# Altium PCB TTAmp_3T0K.PcbDoc
Units mm, origin at the board's own origin, x right, y up, seen from the top; angles counter-clockwise.
Board outline 122 x 59.94 mm, 2 copper layers (Top Layer, Bottom Layer); 145 components, 63 nets, 327 pads, 79 vias.
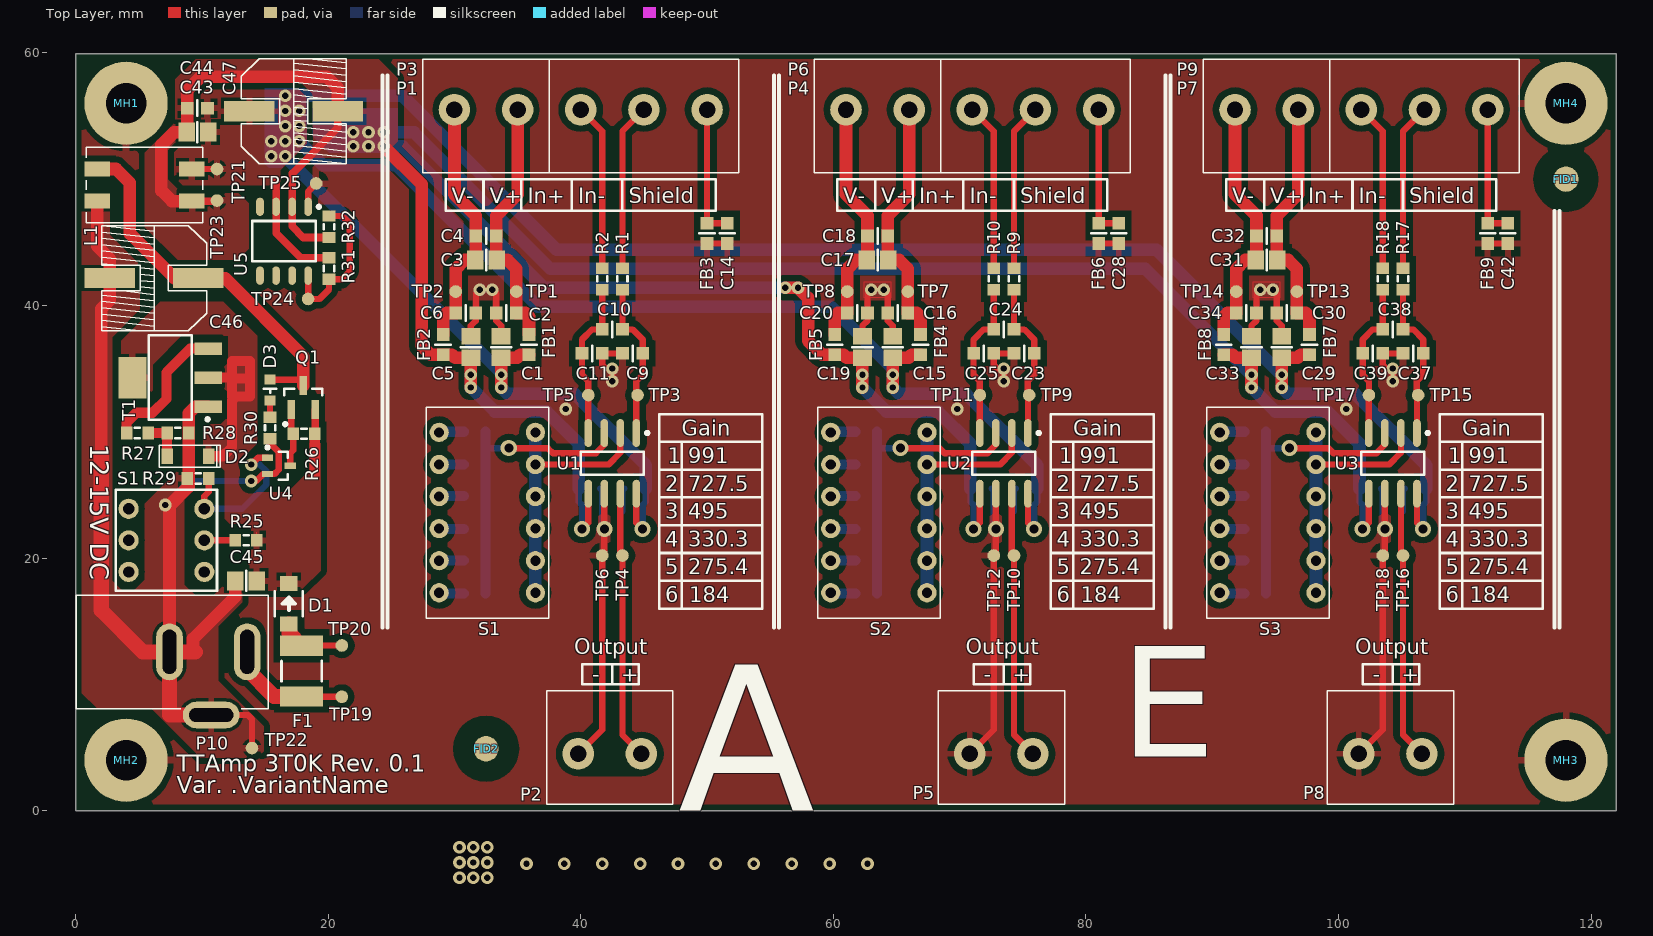
[diagram p0: Top Layer view]
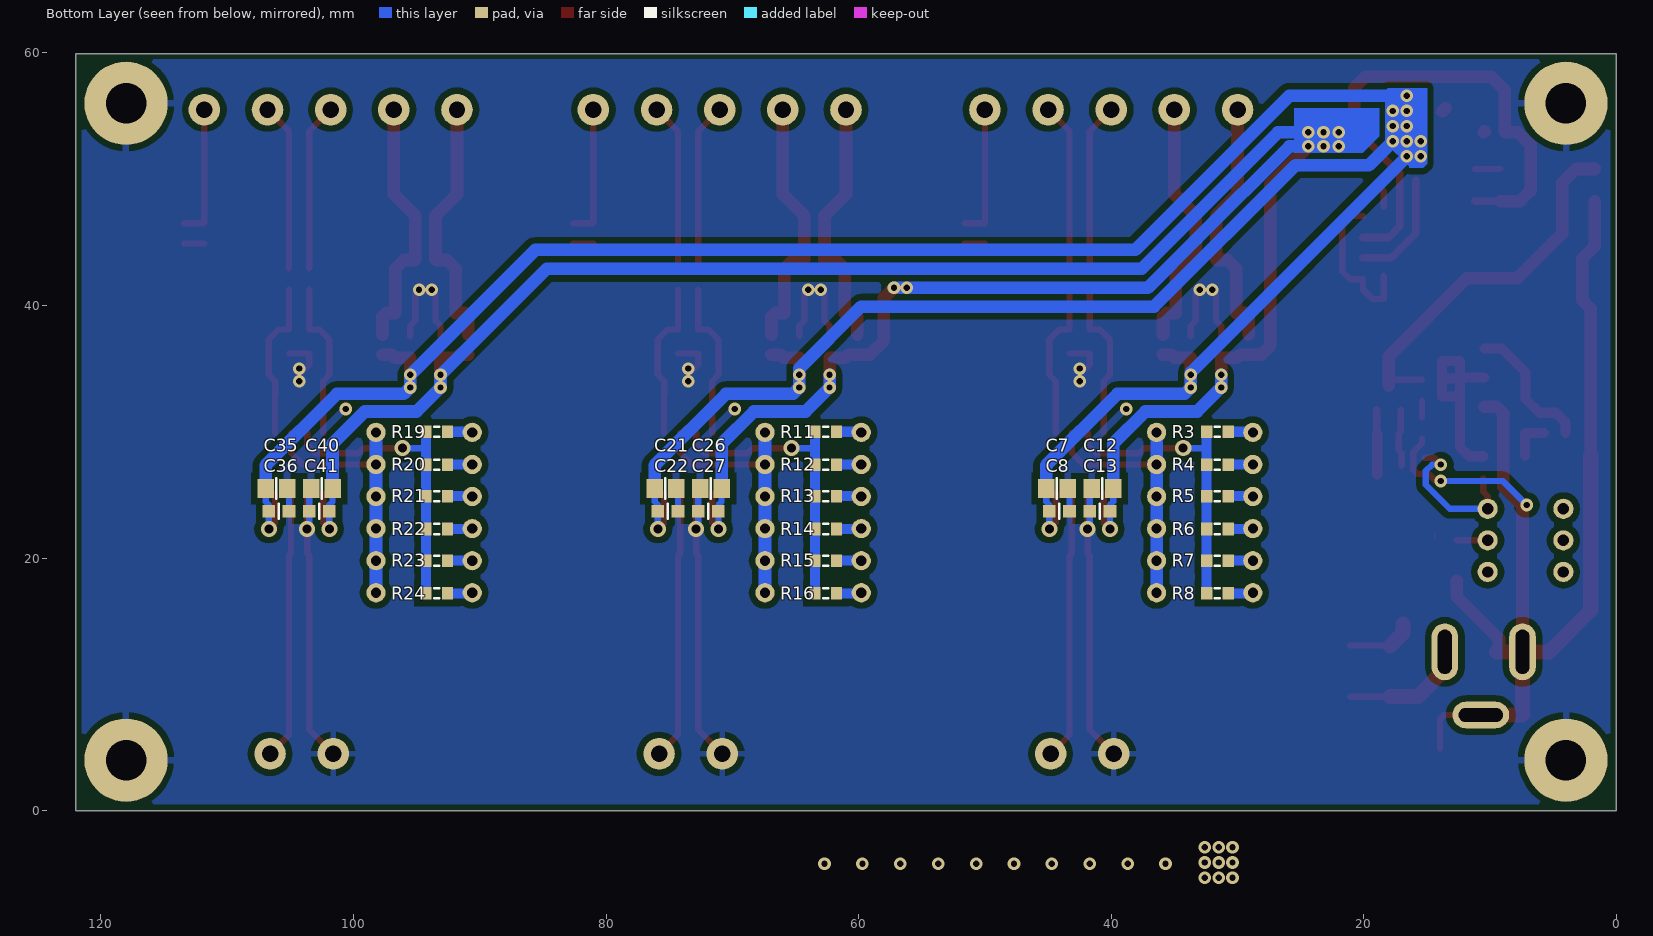
[diagram p1: Bottom Layer view, seen from below]
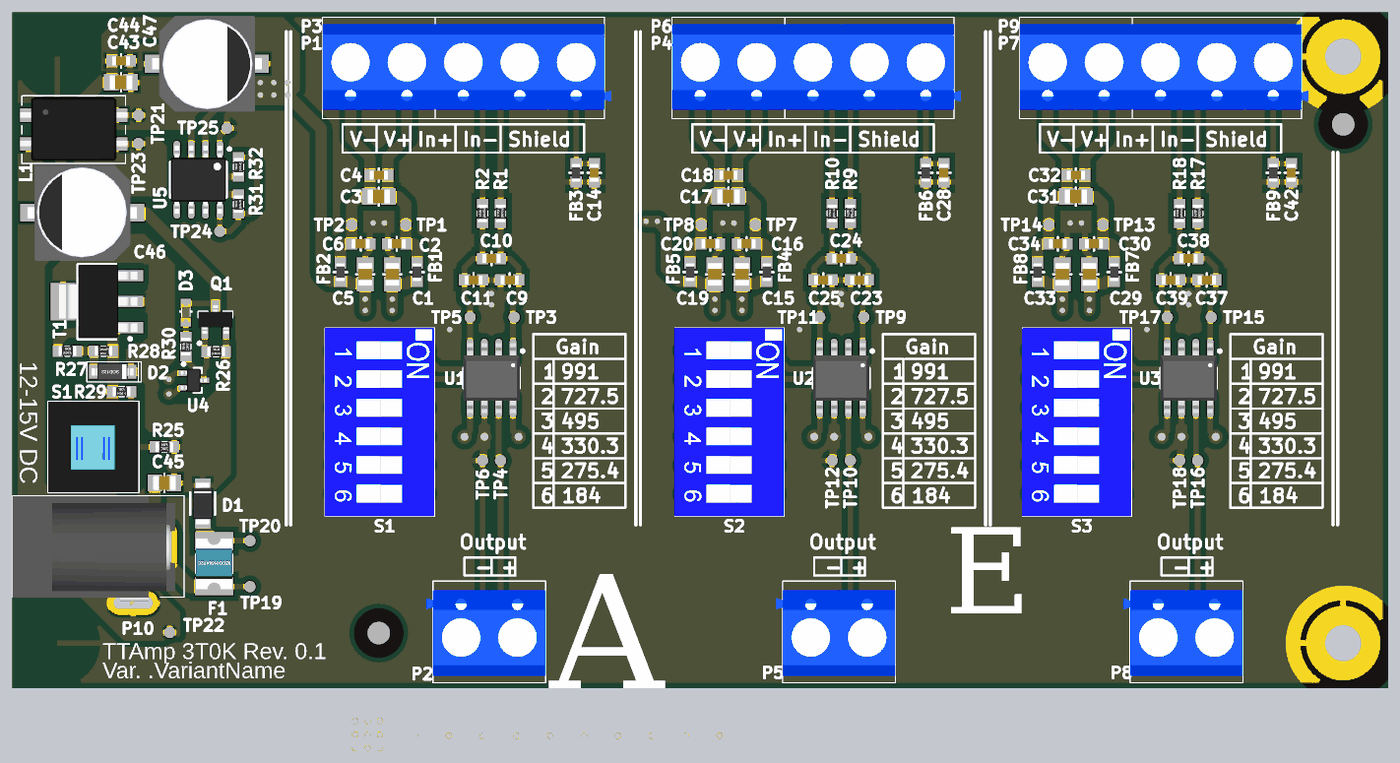
[diagram p2: 3D render of the assembled board from above, using the file's embedded part models]
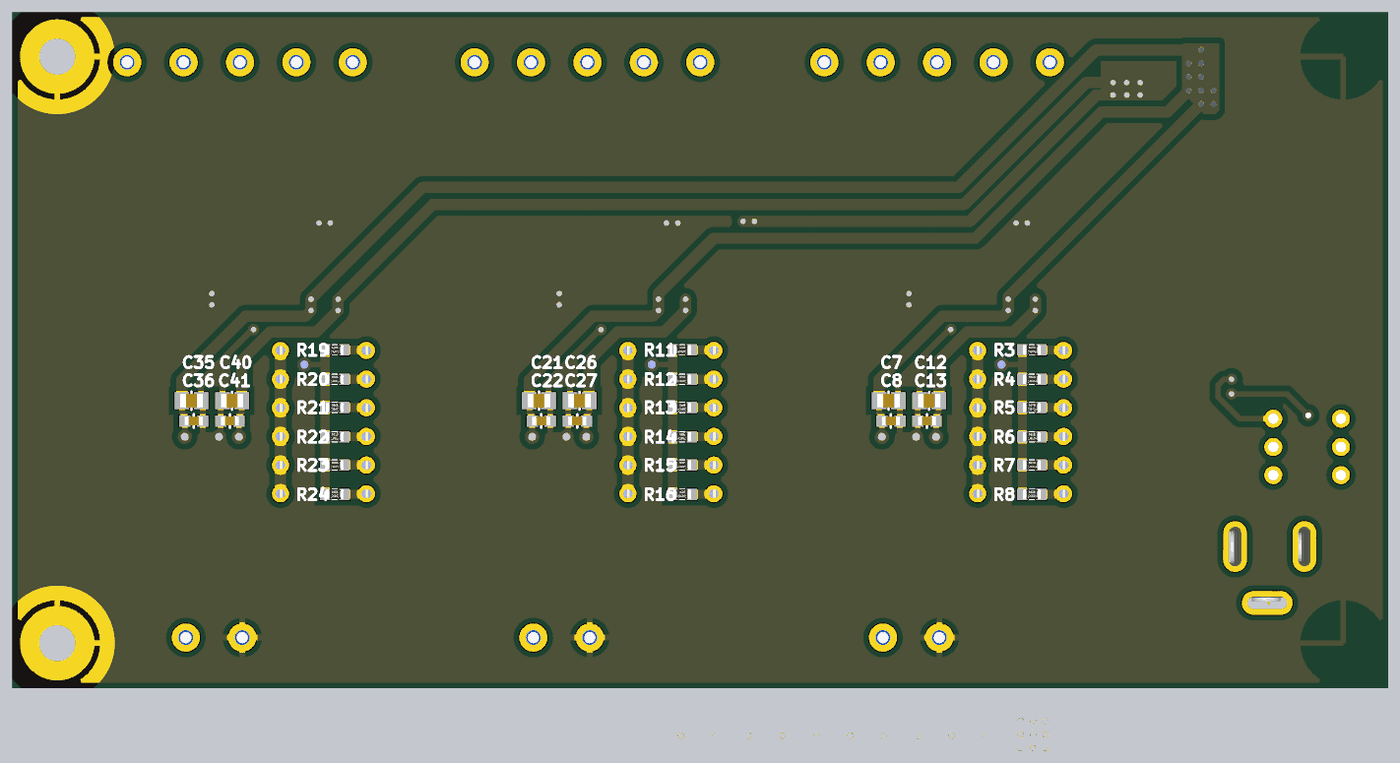
[diagram p3: 3D render of the assembled board from below, using the file's embedded part models]

## Layer stack, top to bottom
Top Solder: solder mask 0.0102, Solder Resist, Dk 3.5
Top Layer: signal copper 0.0356
Dielectric 1: dielectric 0.32, FR-4, Dk 4.8
Bottom Layer: signal copper 0.0356
Bottom Solder: solder mask 0.0102, Solder Resist, Dk 3.5

## Board outline
0,0 122,0 122,59.944 0,59.944

## Design rules (kind name [scope] priority, off if disabled: settings)
Clearance Clearance_1 [InNamedPolygon('GND_L01_P076') vs InComponent('FID*')] p1: gap=1.6 ignorepadtopadclearanceinfootprint=FALSE
Clearance [All] p2: gap=0.2 ignorepadtopadclearanceinfootprint=FALSE except(0.5: Arc-Poly Track-Poly SMDPad-Poly THPad-Poly Via-Poly Fill-Poly Poly-Poly Poly-Region Poly-Hole)
ComponentClearance ScrewTerminals [InComponent('P*')] p2: gap=0 collisioncheckmode=3 verticalgap=2540 showdistances=FALSE
PlaneClearance [All] p1: clearance=0.5
PlaneConnect [All] p1: planeconnectstyle=Relief reliefexpansion=0.5 reliefentries=4 reliefconductorwidth=0.4 reliefairgap=0.4
PolygonConnect PowerPolygon [All vs IsPolygon and ( InNet('Vs+') or InNet('Vs-') or InNet('NetC45_1') or InNet('NetC45_2') or InNet('VT1+') or InNet('VT1-') or InNet('VT2+') or InNet('VT2-') or InNet('VT3+') or InNet('VT3-') )] p1: thpad.connectstyle=Relief thpad.reliefconductorwidth=0.5 thpad.reliefentries=4 thpad.polygonreliefangle="90 Angle" thpad.airgapwidth=0.254 smdpad.connectstyle=Relief smdpad.reliefconductorwidth=0.5 smdpad.reliefentries=4 smdpad.polygonreliefangle="90 Angle" smdpad.airgapwidth=0.254 via.connectstyle=Direct via.reliefconductorwidth=0.254 via.reliefentries=4 via.polygonreliefangle="90 Angle" via.airgapwidth=0.254
PolygonConnect GNDPolygon [All vs IsPolygon and ( InNet('GND') )] p2: thpad.connectstyle=Relief thpad.reliefconductorwidth=0.5 thpad.reliefentries=4 thpad.polygonreliefangle="90 Angle" thpad.airgapwidth=0.5 smdpad.connectstyle=Relief smdpad.reliefconductorwidth=0.5 smdpad.reliefentries=4 smdpad.polygonreliefangle="90 Angle" smdpad.airgapwidth=0.5 via.connectstyle=Direct via.reliefconductorwidth=0.254 via.reliefentries=4 via.polygonreliefangle="90 Angle" via.airgapwidth=0.254
PolygonConnect [All] p3: thpad.connectstyle=Relief thpad.reliefconductorwidth=0.254 thpad.reliefentries=4 thpad.polygonreliefangle="90 Angle" thpad.airgapwidth=0.254 smdpad.connectstyle=Relief smdpad.reliefconductorwidth=0.254 smdpad.reliefentries=4 smdpad.polygonreliefangle="90 Angle" smdpad.airgapwidth=0.254 via.connectstyle=Direct via.reliefconductorwidth=0.254 via.reliefentries=4 via.polygonreliefangle="90 Angle" via.airgapwidth=0.254
RoutingVias [All] p1: holewidth=0.5 width=1 viastyle="Through Hole" minholewidth=0.2 minwidth=0.5 maxholewidth=1 maxwidth=2
SilkToSilkClearance [All] p1: silktosilkclearance=0.2
SolderMaskExpansion [All] p1: expansion=0.102
Width [All] p1: maxlimit=5 minlimit=0.2 preferedwidth=0.5
27 further rules are at their usual default settings.

## Classes and differential pairs
component class TTAmp_3T0K_power: C43 C44 C45 C46 C47 D1 D2 D3 F1 L1 P10 Q1 R25 R26 R27 R28 R29 R30 R31 R32 S1 T1 TP19 TP20 TP21 TP22 TP23 TP24 TP25 U4 U5
component class TTAmp_3T0K_Mechanical: FID1 FID2 MH1 MH2 MH3 MH4 SCR1 SCR2 SCR3 SCR4 SPCR1 SPCR2 SPCR3 SPCR4
component class TTAmp_3T0K_amp_tensometer_3: C29 C30 C31 C32 C33 C34 C35 C36 C37 C38 C39 C40 C41 C42 FB7 FB8 FB9 P7 P8 P9 R17 R18 R19 R20 R21 R22 R23 R24 S3 TP13 TP14 TP15 TP16 TP17 TP18 U3
component class TTAmp_3T0K_amp_tensometer_2: C15 C16 C17 C18 C19 C20 C21 C22 C23 C24 C25 C26 C27 C28 FB4 FB5 FB6 P4 P5 P6 R9 R10 R11 R12 R13 R14 R15 R16 S2 TP7 TP8 TP9 TP10 TP11 TP12 U2
component class TTAmp_3T0K_amp_tensometer_1: C1 C2 C3 C4 C5 C6 C7 C8 C9 C10 C11 C12 C13 C14 FB1 FB2 FB3 P1 P2 P3 R1 R2 R3 R4 R5 R6 R7 R8 S1 TP1 TP2 TP3 TP4 TP5 TP6 U1

## Components (designator, comment, footprint, x,y, rotation, side; value= is the part's Value field where it differs from the comment)
C1 "Capacitor" CAPC2012N 33.7,36.7 r270 top value=10u
C2 "Capacitor" CAPC1608N 34.1,39.4 r0 top value=100n
C3 "Capacitor" CAPC2012N 32.5,43.6 r0 top value=10u
C4 "Capacitor" CAPC1608N 32.5,45.5 r0 top value=100n
C5 "Capacitor" CAPC2012N 31.3,36.7 r90 top value=10u
C6 "Capacitor" CAPC1608N 30.9,39.4 r0 top value=100n
C7 "Capacitor" CAPC2012N 44.3,25.5 r0 bottom value=10u
C8 "Capacitor" CAPC1608N 44.1,23.7 r0 bottom value=100n
C9 "Capacitor" CAPC1608N 44.1,36.2 r180 top value=1n
C10 "Capacitor" CAPC1608N 42.5,38.1 r0 top value=10n
C11 "Capacitor" CAPC1608N 40.9,36.2 r180 top value=1n
C12 "Capacitor" CAPC2012N 40.7,25.5 r0 bottom value=10u
C13 "Capacitor" CAPC1608N 40.9,23.7 r0 bottom value=100n
C14 "Capacitor" CAPC1608N 51.6,45.7 r90 top value=100n
C15 "Capacitor" CAPC2012N 64.7,36.7 r270 top value=10u
C16 "Capacitor" CAPC1608N 65.1,39.4 r0 top value=100n
C17 "Capacitor" CAPC2012N 63.5,43.6 r0 top value=10u
C18 "Capacitor" CAPC1608N 63.5,45.5 r0 top value=100n
C19 "Capacitor" CAPC2012N 62.3,36.7 r90 top value=10u
C20 "Capacitor" CAPC1608N 61.9,39.4 r0 top value=100n
C21 "Capacitor" CAPC2012N 75.3,25.5 r0 bottom value=10u
C22 "Capacitor" CAPC1608N 75.1,23.7 r0 bottom value=100n
C23 "Capacitor" CAPC1608N 75.1,36.2 r180 top value=1n
C24 "Capacitor" CAPC1608N 73.5,38.1 r0 top value=10n
C25 "Capacitor" CAPC1608N 71.9,36.2 r180 top value=1n
C26 "Capacitor" CAPC2012N 71.7,25.5 r0 bottom value=10u
C27 "Capacitor" CAPC1608N 71.9,23.7 r0 bottom value=100n
C28 "Capacitor" CAPC1608N 82.6,45.7 r90 top value=100n
C29 "Capacitor" CAPC2012N 95.5,36.7 r270 top value=10u
C30 "Capacitor" CAPC1608N 95.9,39.4 r0 top value=100n
C31 "Capacitor" CAPC2012N 94.3,43.6 r0 top value=10u
C32 "Capacitor" CAPC1608N 94.3,45.5 r0 top value=100n
C33 "Capacitor" CAPC2012N 93.1,36.7 r90 top value=10u
C34 "Capacitor" CAPC1608N 92.7,39.4 r0 top value=100n
C35 "Capacitor" CAPC2012N 106.1,25.5 r0 bottom value=10u
C36 "Capacitor" CAPC1608N 105.9,23.7 r0 bottom value=100n
C37 "Capacitor" CAPC1608N 105.9,36.2 r180 top value=1n
C38 "Capacitor" CAPC1608N 104.3,38.1 r0 top value=10n
C39 "Capacitor" CAPC1608N 102.7,36.2 r180 top value=1n
C40 "Capacitor" CAPC2012N 102.5,25.5 r0 bottom value=10u
C41 "Capacitor" CAPC1608N 102.7,23.7 r0 bottom value=100n
C42 "Capacitor" CAPC1608N 113.4,45.7 r90 top value=100n
C43 "Capacitor" CAPC2012N 9.652,53.721 r0 top value=10u
C44 "Capacitor" CAPC1608N 9.652,55.626 r0 top value=100n
C45 "Capacitor" CAPC2012N 13.5,18.2 r0 top value=10u
C46 "SC1E227M08010VR" 8x10 6.223,42.164 r270 top value=220u
C47 "SC1E227M08010VR" 8x10 17.272,55.372 r90 top value=220u
D1 "MBRA140T3G" SMA 16.891,16.383 r90 top
D2 "Zener Diode" SOD123 8.906,28.061 r0 top value=18V
D3 "Green" LED_0603_GREEN 15.4,33.3 r270 top
F1 "PTC Fuse" RESC4532N 17.907,11.049 r90 top value=500mA
FB1 "Ferrite Bead" INDC1608N 35.9,36.9 r270 top value=120@100MHz
FB2 "Ferrite Bead" INDC1608N 29.1,36.9 r270 top value=120@100MHz
FB3 "Ferrite Bead" INDC1608N 50,45.7 r270 top value=120@100MHz
FB4 "Ferrite Bead" INDC1608N 66.9,36.9 r270 top value=120@100MHz
FB5 "Ferrite Bead" INDC1608N 60.1,36.9 r270 top value=120@100MHz
FB6 "Ferrite Bead" INDC1608N 81,45.7 r270 top value=120@100MHz
FB7 "Ferrite Bead" INDC1608N 97.7,36.9 r270 top value=120@100MHz
FB8 "Ferrite Bead" INDC1608N 90.9,36.9 r270 top value=120@100MHz
FB9 "Ferrite Bead" INDC1608N 111.8,45.7 r270 top value=120@100MHz
FID1 "Fiducial" Fiducial 118,50 r0 top
FID2 "Fiducial" Fiducial 32.5,4.9 r0 top
L1 "CMDC-9260-50" "CMDC-09260 HF" 5.461,49.53 r270 top value=50uH
MH1 "Mounting Hole" MH-M3_Copper#1 48.133,74.93 r0 top
MH2 "Mounting Hole" MH-M3_Copper#2 29.464,76.073 r0 top
MH3 "Mounting Hole" MH-M3_Copper#3 118,4 r0 top
MH4 "Mounting Hole" MH-M3_Copper#3 118,56 r0 top
P1 "AK100/3DS-5,0-V/GRAU" AK100/3DS-5,0-V/GRAU 45,55.5 r180 top
P2 "AK100/2DS-5,0-V/GRAU" AK100/2DS-5,0-V/GRAU 44.8,4.5 r0 top
P3 "AK100/2DS-5,0-V/GRAU" AK100/2DS-5,0-V/GRAU 30,55.5 r180 top
P4 "AK100/3DS-5,0-V/GRAU" AK100/3DS-5,0-V/GRAU 76,55.5 r180 top
P5 "AK100/2DS-5,0-V/GRAU" AK100/2DS-5,0-V/GRAU 75.8,4.5 r0 top
P6 "AK100/2DS-5,0-V/GRAU" AK100/2DS-5,0-V/GRAU 61,55.5 r180 top
P7 "AK100/3DS-5,0-V/GRAU" AK100/3DS-5,0-V/GRAU 106.8,55.5 r180 top
P8 "AK100/2DS-5,0-V/GRAU" AK100/2DS-5,0-V/GRAU 106.6,4.5 r0 top
P9 "AK100/2DS-5,0-V/GRAU" AK100/2DS-5,0-V/GRAU 91.8,55.5 r180 top
P10 "12-15V DC" FC681478 0.039,12.573 r270 top
Q1 "AO3407A" SOT23-3N 18.026,32.694 r90 top
R1 "Resistor" RESC1608N 43.3,42.1 r90 top value=4.02k
R2 "Resistor" RESC1608N 41.7,42.1 r90 top value=4.02k
R3 "Resistor" RESC1608N 31.6,30 r180 bottom value=49.9
R4 "Resistor" RESC1608N 31.6,27.4 r180 bottom value=68
R5 "Resistor" RESC1608N 31.6,24.9 r180 bottom value=100
R6 "Resistor" RESC1608N 31.6,22.3 r180 bottom value=150
R7 "Resistor" RESC1608N 31.6,19.8 r180 bottom value=180
R8 "Resistor" RESC1608N 31.6,17.2 r180 bottom value=270
R9 "Resistor" RESC1608N 74.3,42.1 r90 top value=4.02k
R10 "Resistor" RESC1608N 72.7,42.1 r90 top value=4.02k
R11 "Resistor" RESC1608N 62.6,30 r180 bottom value=49.9
R12 "Resistor" RESC1608N 62.6,27.4 r180 bottom value=68
R13 "Resistor" RESC1608N 62.6,24.9 r180 bottom value=100
R14 "Resistor" RESC1608N 62.6,22.3 r180 bottom value=150
R15 "Resistor" RESC1608N 62.6,19.8 r180 bottom value=180
R16 "Resistor" RESC1608N 62.6,17.2 r180 bottom value=270
R17 "Resistor" RESC1608N 105.1,42.1 r90 top value=4.02k
R18 "Resistor" RESC1608N 103.5,42.1 r90 top value=4.02k
R19 "Resistor" RESC1608N 93.4,30 r180 bottom value=49.9
R20 "Resistor" RESC1608N 93.4,27.4 r180 bottom value=68
R21 "Resistor" RESC1608N 93.4,24.9 r180 bottom value=100
R22 "Resistor" RESC1608N 93.4,22.3 r180 bottom value=150
R23 "Resistor" RESC1608N 93.4,19.8 r180 bottom value=180
R24 "Resistor" RESC1608N 93.4,17.2 r180 bottom value=270
R25 "Resistor" RESC1608N 13.5,21.4 r0 top value=82k
R26 "Resistor" RESC1608N 18.087,29.839 r0 top value=100k
R27 "Resistor" RESC1608N 4.9,29.9 r0 top value=100
R28 "Resistor" RESC1608N 8.1,29.9 r180 top value=100
R29 "Resistor" RESC1608N 9.7,26.3 r0 top value=6k8
R30 "Resistor" RESC1608N 15.4,30.3 r90 top value=4k7
R31 "Resistor" RESC1608N 20.066,42.926 r90 top value=100k
R32 "Resistor" RESC1608N 20.066,46.228 r90 top value=100k
S1 "BS-800-L" BS-800-L 7.2,21.4 r90 top
S1 "EDG106S" EDG106S 32.6,23.6 r270 top
S2 "EDG106S" EDG106S 63.6,23.6 r270 top
S3 "EDG106S" EDG106S 94.4,23.6 r270 top
T1 "P0102MN" SOT223_N 7.509,34.284 r180 top
TP1 "" TP-SMD-1.0MM 34.9,41.1 r90 top
TP2 "" TP-SMD-1.0MM 30.1,41.1 r90 top
TP3 "" TP-SMD-1.0MM 44.5,32.9 r90 top
TP4 "" TP-SMD-1.0MM 43.3,20.2 r90 top
TP5 "" TP-SMD-1.0MM 40.6,32.9 r90 top
TP6 "" TP-SMD-1.0MM 41.7,20.2 r90 top
TP7 "" TP-SMD-1.0MM 65.9,41.1 r90 top
TP8 "" TP-SMD-1.0MM 61.1,41.1 r90 top
TP9 "" TP-SMD-1.0MM 75.5,32.9 r90 top
TP10 "" TP-SMD-1.0MM 74.3,20.2 r90 top
TP11 "" TP-SMD-1.0MM 71.6,32.9 r90 top
TP12 "" TP-SMD-1.0MM 72.7,20.2 r90 top
TP13 "" TP-SMD-1.0MM 96.7,41.1 r90 top
TP14 "" TP-SMD-1.0MM 91.9,41.1 r90 top
TP15 "" TP-SMD-1.0MM 106.3,32.9 r90 top
TP16 "" TP-SMD-1.0MM 105.1,20.2 r90 top
TP17 "" TP-SMD-1.0MM 102.4,32.9 r90 top
TP18 "" TP-SMD-1.0MM 103.5,20.2 r90 top
TP19 "" TP-SMD-1.0MM 21.082,9.017 r90 top
TP20 "" TP-SMD-1.0MM 21.082,13.081 r90 top
TP21 "" TP-SMD-1.0MM 11.2,50.8 r90 top
TP22 "" TP-SMD-1.0MM 13.97,4.953 r90 top
TP23 "" TP-SMD-1.0MM 11.2,48.3 r90 top
TP24 "" TP-SMD-1.0MM 18.415,40.513 r270 top
TP25 "" TP-SMD-1.0MM 19.05,49.657 r270 top
U1 "AD8221" R-8_N 42.5,27.5 r270 top
U2 "AD8221" R-8_N 73.5,27.5 r270 top
U3 "AD8221" R-8_N 104.3,27.5 r270 top
U4 "BC847" SOT323_L 16.1,27.3 r0 top
U5 "TLE2426" SOIC8 16.51,45.085 r270 top

## Footprints (in the part's own frame and the unit in brackets; to place one, negate y for a bottom-side part, rotate by r counter-clockwise, add the part's x,y. Pads: shape width x height; smd on the part's side, far side on the other; paste and mask are expansions set on the pad)
8x10 [mm] "O8x10mm"
  rect 1.6x4 smd: 1(0,3.5) 2(0,-3.5)
  silkscreen extent -4.2,-4.15 4.15,4.15, body extent -4.25,-4.85 4.25,4.85, height 10.5
AK100/2DS-5,0-V/GRAU [mm] "Listwa zaciskowa do druku; k¹towe 90°; 5mm; tory:2; na PCB; 24A"
  round 2.5 hole 1.3: 1(-5,0) 2(0,0)
  silkscreen extent -7.5,-4 2.5,5, body extent -8.1,-3.4 2.5,4.2, height 10
AK100/3DS-5,0-V/GRAU [mm] "Listwa zaciskowa do druku; k¹towe 90°; 5mm; tory:3; na PCB; 24A"
  round 2.5 hole 1.3: 1(-5,0) 2(0,0) 3(5,0)
  silkscreen extent -7.5,-4 7.5,5, body extent -8.1,-3.4 7.5,4.2, height 10
BS-800-L [mm]
  round 1.6 hole 0.9: 1(-2.5,-3) 2(0,-3) 3(2.5,-3) 4(-2.5,3) 5(0,3) 6(2.5,3)
  silkscreen extent -4,-4 4,4, body extent -4,-4 4,4, height 13.52
CAPC1608N [mm] "Chip Capacitor, Body 1.6x0.8mm, IPC Medium Density"
  rect 1x1 smd: 1(-0.8,0) 2(0.8,0)
  silkscreen extent 0,-0.6 0,0.6, body extent -0.8,-0.4 0.8,0.4, height 0.9
CAPC2012N [mm] "Chip Capacitor, Body 2.0x1.3mm, IPC Medium Density"
  rect 1.3x1.5 smd: 1(-0.85,0) 2(0.85,0)
  silkscreen extent 0,-0.8 0,0.8, body extent -1,-0.62 1,0.63, height 1
"CMDC-09260 HF" [mm]
  rect 1.2x2 smd: 1(-1.27,-3.75) 2(1.27,-3.75) 3(1.27,3.75) 4(-1.27,3.75)
  silkscreen extent -3,-4.6 3,4.6, body extent -2.86,-4.75 2.79,4.75, height 4.9
EDG106S [mil]
  round 60 hole 31.5: 1(-250,-150) 2(-150,-150) 3(-50,-150) 4(50,-150) 5(150,-150) 6(250,-150) 7(250,150) 8(150,150) 9(50,150) 10(-50,150) 11(-150,150) 12(-250,150)
  silkscreen extent -329,-191 329,191, body extent -329,-193 328,189, height 273
FC681478 [mm] "DC barrel jack"
  oval 4.5x2.1 hole 1.1 slot 3.5 at 0 deg: 1(0,13.55) 3(0,7.4)
  oval 2.1x4.5 hole 1.1 slot 3.5 at 90 deg: 2(5,10.7)
  silkscreen extent -4.5,0 4.5,15.2, body extent -4.45,0 4.85,14.4, height 11.1
Fiducial [mm] "Fiducial"
  round 2 smd mask+1.2: FID(0,0)
INDC1608N [mm] "Chip Inductor, Body 1.6x0.8mm, IPC Medium Density"
  rect 1x1 smd: 1(-0.8,0) 2(0.8,0)
  silkscreen extent 0,-0.6 0,0.6, body extent -0.8,-0.4 0.8,0.4, height 0.9
LED_0603_GREEN [mm] "Chip Diode, 2-Leads, Body 1,60x0,80mm, IPC Medium Density"
  rect 0.8x0.9 smd: A(-0.825,0) K(0.825,0)
  silkscreen extent -0.1,-0.5 0.2,0.5, body extent -0.8,-0.4 0.8,0.4, height 0.6
MH-M3_Copper#1 [mm] "M3 screw Mounting Hole with copper without washer"
  round 6.6 hole 3.2 mask+1.8: MH(-44.133,-18.93)
MH-M3_Copper#2 [mm] "M3 screw Mounting Hole with copper without washer"
  round 6.6 hole 3.2 mask+1.8: MH(-25.464,-72.073)
MH-M3_Copper#3 [mm] "M3 screw Mounting Hole with copper without washer"
  round 6.6 hole 3.2 mask+1.8: MH(0,0)
R-8_N [mm] "SOIC, 8-Leads, Body 4.9x3.9mm, Pitch 1.27mm, IPC Medium Density"
  oval 2.2x0.6 smd: 1(-2.4,1.905) 2(-2.4,0.635) 3(-2.4,-0.635) 4(-2.4,-1.905) 5(2.4,-1.905) 6(2.4,-0.635) 7(2.4,0.635) 8(2.4,1.905)
  silkscreen extent -2.52,-2.5 0.9,2.88, body extent -3.1,-2.5 3.1,2.5, height 1.75
RESC1608N [mm] "Chip Resistor, Body 1.6x0.8mm, IPC Medium Density"
  rect 0.9x1 smd: 1(-0.85,0) 2(0.85,0)
  silkscreen extent -0.2,-0.4 0.2,0.4, body extent -0.77,-0.42 0.78,0.43, height 0.45
RESC4532N [mm] "Chip Resistor, Body 4.5x3.2mm, IPC Medium Density"
  rect 1.6x3.4 smd: 1(-2,0) 2(2,0)
  silkscreen extent -0.8,-1.6 0.8,1.6, body extent -2.25,-1.6 2.25,1.6, height 0.86
SMA [mm]
  rect 1.2x1.4 smd mask+0.02: A(-1.6,0) K(1.6,0)
  silkscreen extent -1,-1.1 1,1.1, body extent -1.85,-0.9 1.85,0.9, height 1.35
SOD123 [mm] "3.7mm x 1.6mm x 1.4mm (LxWxH)"
  rect 0.91x1.22 smd: 1(-1.635,0) 2(1.635,0)
  silkscreen extent -2.29,-0.89 2.54,0.89, body extent -1.85,-0.77 1.85,0.78, height 1.35
SOIC8 [mm] "SOIC, 8-Leads, Body 4,90x3,90mm, Pitch 1,27mm, IPC Medium Density"
  oval 1.45x0.6 smd: 1(-2.725,1.905) 2(-2.725,0.635) 3(-2.725,-0.635) 4(-2.725,-1.905) 5(2.725,-1.905) 6(2.725,-0.635) 7(2.725,0.635) 8(2.725,1.905)
  silkscreen extent -2.85,-2.5 1.6,2.88, body extent -3,-2.45 3,2.45, height 1.75
SOT23-3N [mm] "SOT23, 3-Leads, Body 2.9x1.3mm, Pitch 0.95mm, Lead Span 2.5mm, IPC Medium Density"
  rect 1.5x0.6 smd: 1(-0.95,0.95) 2(-0.95,-0.95) 3(0.95,0)
  silkscreen extent -2.22,-1.5 0.7,1.55, body extent -1.25,-1.5 1.25,1.5, height 1.05
SOT223_N [mm] "SOT223, 4-Leads, Body 6.5x3.5mm, Pitch 2.3mm, Lead Span 7mm, IPC Medium Density"
  rect 2.2x1 smd: 1(-3,2.3) 2(-3,0) 3(-3,-2.3)
  rect 2.2x3.3 smd: 2(3,0)
  silkscreen extent -3.08,-3.35 1.7,3.42, body extent -3.61,-3.25 3.35,3.25, height 1.66
SOT323_L [mm] "SOT323, 3-Leads, Body 2.0x1.3mm, Pitch 0.65mm, Lead Span 2.1mm, IPC High Density"
  rect 0.9x0.5 smd: 1(-0.9,0.65) 2(-0.9,-0.65) 3(0.9,0)
  silkscreen extent -1.02,-1.1 0.7,1.57, body extent -1.15,-1.05 1.15,1.05, height 1
TP-SMD-1.0MM [mm]
  round 1 smd: 1(0,0)

## Part data
C1 C3 C5 C7 C12 C15 C17 C19 C21 C26 C29 C31 C33 C35 C40 C43 C45: MaxVoltage=25V, Supplier Part Number 1=GRM21BR61E106KA73L, Tolerance=10%, Supplier 1=TME
C2 C4 C6 C8 C13 C14 C16 C18 C20 C22 C27 C28 C30 C32 C34 C36 C41 C42 C44: MaxVoltage=50V, Supplier Part Number 1=CL10B104KB8NNNC, Tolerance=10%, Supplier 1=TME
C9 C11 C23 C25 C37 C39: MaxVoltage=50V, Supplier Part Number 1=VJ0603Y102KXACW1BC, Tolerance=10%, Supplier 1=TME
C10 C24 C38: MaxVoltage=50V, Supplier Part Number 1=VJ0603Y103MXACW1BC, Tolerance=20%, Supplier 1=TME
C46 C47: library part "Capacitor Polarized", Manufacturer 1=SAMWHA, MaxVoltage=25V, Tolerance=20%, Manufacturer Part Number 1=SC1E227M08010VR, Supplier 1=TME, Supplier Part Number 1=SC1E227M08010VR
D1: "Dioda: prostownicza Schottky; SMD; 40V; 1A; SMA", Manufacturer 1="ON SEMICONDUCTOR", Manufacturer Part Number 1=MBRA140T3G, Supplier 1=TME, Supplier Part Number 1=MBRA140T3G
D2: library part MMSZ5227BT1G, "Zener Diode 18V 0.5W smd SOD123", Manufacturer 1="ON SEMICONDUCTOR", Manufacturer Part Number 1=MMSZ18T1G, Supplier 1=TME, Supplier Part Number 1=MMSZ18T1G
D3: library part LED_SMD_0603, "LED 0603", Manufacturer 1=OPTOSUPPLY, Manufacturer Part Number 1=OSG80603C1E, MaxCurrent=5mA, Voltage=1.6-2.4V, Color=Green, Supplier 1=TME, Supplier Part Number 1=OSG80603C1E
F1: library part SD075-16, "PTC Fuse 750mA", Manufacturer 1=ECE, Manufacturer Part Number 1=SD050-16, Max Voltage=16V, Stand Current=500mA, Supplier 1=TME, Supplier Part Number 1=SD075-16
FB1 FB2 FB3 FB4 FB5 FB6 FB7 FB8 FB9: library part Inductor, Max Current=3A, Supplier Part Number 1=BLM18KG121TN1D, Supplier 1=TME
FID1 FID2: library part FID
L1: "D³awik: common mode; SMD; 800mA; 320m?; Ind.poj.uzw:50uH; Il.uzw:2", Manufacturer 1=FERROCORE, Max Current=800mA, Max Voltage=80VDC, Resistance=320mOhm, Manufacturer Part Number 1=CMDC-9260-50, Supplier 1=TME, Supplier Part Number 1=CMDC-9260-50
MH1 MH2 MH3 MH4: library part MH, "M3 mounting hole"
P1 P4 P7: "Listwa zaciskowa do druku; k¹towe 90°; 5mm; tory:3; na PCB; 24A", Manufacturer="PTR MESSTECHNIK", Supplier Part Number 1=TB-5.0-P-3P-12, Manufacturer Part Number=AK100/3DS-5,0-V/GRAU, Supplier 1=TME
P2 P3 P5 P6 P8 P9: "Listwa zaciskowa do druku; k¹towe 90°; 5mm; tory:2; na PCB; 24A", Manufacturer="PTR MESSTECHNIK", Supplier Part Number 1=TB-5.0-P-2P-12, Manufacturer Part Number=AK100/2DS-5,0-V/GRAU, Supplier 1=TME
P10: library part FC68148, "Socket; Barrel jack DC; male; 5,5/2,1mm; THT", Manufacturer 1=Cliff, Manufacturer Part Number 1="DC-10A FC68148", Max Current=5A, Max Voltage=12VDC, Supplier 1=TME, Supplier Part Number 1=FC68148
Q1: library part MOSFET-P, "P-Channel MOSFET", Manufacturer 1="ALPHA & OMEGA SEMICONDUCTOR", Manufacturer Part Number 1=AO3407A, Supplier 1=TME, Supplier Part Number 1=AO3407A
R1 R2 R9 R10 R17 R18: Manufacturer 1=VIKING, Manufacturer Part Number 1=AR03BTCX4021, Power=0.1W, Supplier Part Number 1=AR0603-4K02-0.1%, Tolerance=0.1%, Supplier 1=TME
R3 R11 R19: Manufacturer 1=VIKING, Manufacturer Part Number 1=AR03BTCX49R9, Power=0.1W, Supplier Part Number 1=AR0603-49R9-0.1%, Tolerance=0.1%, Supplier 1=TME
R4 R12 R20: Manufacturer=VIKING, Manufacturer Part Number 1=AR03BTCX0680, Power=0.1W, Supplier Part Number 1=AR0603-68R-0.1%, Tolerance=0.1%, Supplier 1=TME
R5 R13 R21: Manufacturer 1=VIKING, Manufacturer Part Number 1=AR03BTCX1000, Power=0.1W, Supplier Part Number 1=AR0603-100R-0.1%, Tolerance=0.1%, Supplier 1=TME
R6 R14 R22: Manufacturer 1=VIKING, Manufacturer Part Number 1=AR03BTCX1500, Power=0.1W, Supplier Part Number 1=AR0603-150R-0.1%, Tolerance=0.1%, Supplier 1=TME
R7 R15 R23: Manufacturer 1=VIKING, Manufacturer Part Number 1=AR03BTCX1800, Power=0.1W, Supplier Part Number 1=AR0603-180R-0.1%, Tolerance=0.1%, Supplier 1=TME
R8 R16 R24: Manufacturer 1=VIKING, Manufacturer Part Number 1=AR03BTCX2700, Power=0.1W, Supplier Part Number 1=AR0603-180R-0.1%, Tolerance=0.1%, Supplier 1=TME
R25: Manufacturer 1=WALSIN, Manufacturer Part Number 1=WF06P823JTL, Power=0.125W, Supplier Part Number 1=WF06P-82K-5%, Tolerance=5%, Supplier 1=TME
R26 R31 R32: Manufacturer 1="ROYAL OHM", Manufacturer Part Number 1=HP03W5J0104T5E, Power=0.2W, Supplier Part Number 1=HP03-100K5%, Tolerance=5%, Supplier 1=TME
R27 R28: Manufacturer 1=WALSIN, Manufacturer Part Number 1=WF06P101JTL, Power=0.125W, Supplier Part Number 1=WF06P-100R-5%, Tolerance=5%, Supplier 1=TME
R29: Manufacturer 1=YAGEO, Manufacturer Part Number 1=RC0603JR-076K8L, Power=0.1W, Supplier Part Number 1=RC0603JR-076K8, Tolerance=5%, Supplier 1=TME
R30: Manufacturer 1=WALSIN, Manufacturer Part Number 1=WF06P472JTL, Power=0.125W, Supplier Part Number 1=WF06P-4K7-5%, Tolerance=5%, Supplier 1=TME
S1: Manufacturer 1="CANAL ELECTRONIC", Max Current=0.1A, Max Voltage=30VDC, Supplier Part Number 1=BS800L, Manufacturer Part Number 1=BS-800-L, Supplier 1=TME
S1 S2 S3: "Prze³¹cznik: DIP-SWITCH; Iloœæ sekcji:6; ON-OFF; 0,1A/24VDC; 500V", Manufacturer 1=ECE, Manufacturer Part Number 1=EDG106S, Supplier 1=TME, Supplier Part Number 1=EDG106S
T1: library part "P0102MN 5AA4", Manufacturer 1="ST MICROELECTRONICS", Supplier Part Number 1=P0102MN-5AA4, Manufacturer Part Number 1="P0102MN 5AA4", Supplier 1=TME
TP1 TP2 TP3 TP4 TP5 TP6 TP7 TP8 TP9 TP10 TP11 TP12 TP13 TP14 TP15 TP16 TP17 TP18 TP19 TP20 TP21 TP22 TP23 TP24 TP25: library part TP1, "Test Point for probe"
U1 U2 U3: "Precision Instrumentation Amplifier", Manufacturer 1="ANALOG DEVICES", Manufacturer Part Number 1=AD8221BRZ, ComponentLink1Description="Manufacturer Link", ComponentLink1URL=http://www.analog.com/en/prod/0%2C2877%2CAD622%2C00.html, ComponentLink2Description=Datasheet, ComponentLink2URL=http://www.analog.com/UploadedFiles/Data_Sheets/218546992AD622_c.pdf, PackageReference 1=SOIC_N, Supplier 1=TME, Supplier Part Number 1=AD8221BRZ
U4: library part BC847AW.115, "Tranzystor: NPN; bipolarny; 45V; 200mA; 200mW; SOT323", Manufacturer 1=NEXPERIA, Manufacturer Part Number 1=BC847AW.115, Supplier 1=TME, Supplier Part Number 1=BC847AW.115
U5: "Texas Instrument Low-Noise JFET-Input Operational Amplifier", Manufacturer 1="TEXAS INSTRUMENTS", Manufacturer Part Number 1=TLE2426ID, Supplier Part Number 1=8454833, Supplier 1=Farnell

## Via types
v1: diameter 1, hole 0.5, Top Layer to Bottom Layer, tented both sides, 67 vias
v2: diameter 1.27, hole 0.711, Top Layer to Bottom Layer, tented both sides, 12 vias

## Nets (pads, with @x,y where several pads share a name; then routed paths per layer and width w, separated by ;. In a path a pad name is that pad's centre, name@x,y a point inside that pad or via, vN(x,y) a via of type N, cw(c..) or ccw(c..) an arc to the next point about the centre after c; other vN are vias at no path point)
GND: C1.1 C2.1 C5.2 C6.2 C7.1 C8.1 C9.2 C11.1 C12.2 C13.2 C14.1 C15.1 C16.1 C19.2 C20.2 C21.1 C22.1 C23.2 C25.1 C26.2 C27.2 C28.1 C29.1 C30.1 C33.2 C34.2 C35.1 C36.1 C37.2 C39.1 C40.2 C41.2 C42.1 FB3.2 FB6.2 FB9.2 MH1.MH MH2.MH MH3.MH MH4.MH P2.1 P5.1 P8.1 TP6.1 TP12.1 TP18.1 TP25.1 U1.6 U2.6 U3.6 U5.1 | length 124.1
  Top Layer w0.5: U5.1 18.415,49.022 TP25.1 ; C5.2 31.3,38.4 31.7,38.8 C6.2 31.7,40.95 v1(32,41.25) ; v1(33,41.25) 33.3,40.95 C2.1 33.3,38.8 33.7,38.4 C1.1 ; P2.1 41.7,6.4 TP6.1 41.865,20.365 v2(41.865,22.3) U1.6 ; v1(42.5,34) v1(42.5,35) 42,35 41.7,35.3 C11.1 C9.2 ; FB3.2 C14.1 ; C19.2 62.3,38.4 62.7,38.8 C20.2 62.7,40.95 v1(63,41.25) ; v1(64,41.25) 64.3,40.95 C16.1 64.3,38.8 64.7,38.4 C15.1 ; P5.1 72.7,6.4 TP12.1 72.865,20.365 v2(72.865,22.3) U2.6 ; v1(73.5,34) v1(73.5,35) 73,35 72.7,35.3 C25.1 C23.2 ; FB6.2 C28.1 ; C33.2 93.1,38.4 93.5,38.8 C34.2 93.5,40.95 v1(93.8,41.25) ; v1(94.8,41.25) 95.1,40.95 C30.1 95.1,38.8 95.5,38.4 C29.1 ; P8.1 103.5,6.4 TP18.1 103.665,20.365 v2(103.665,22.3) U3.6 ; v1(104.3,34) v1(104.3,35) 103.8,35 103.5,35.3 C39.1 C37.2 ; FB9.2 C42.1
  Bottom Layer w0.5: C12.2 41.7,25.35 C13.2 41.7,22.465 v2(41.865,22.3) ; C8.1 43.3,25.35 C7.1 ; C26.2 72.7,25.35 C27.2 72.7,22.465 v2(72.865,22.3) ; C22.1 74.3,25.35 C21.1 ; C40.2 103.5,25.35 C41.2 103.5,22.465 v2(103.665,22.3) ; C36.1 105.1,25.35 C35.1
  other v1: 38.8,31.8 69.8,31.8 100.6,31.8
NetC9_1: C9.1 C10.2 R1.1 TP3.1 U1.1 | length 12.7
  Top Layer w0.5: R1.1 C10.2 44.1,38.1 44.9,37.3 C9.1 44.9,34.5 44.4,34 TP3.1@44.4,32.9 ; U1.1 TP3.1@44.405,32.895 ; TP3.1@44.4,32.9 TP3.1@44.405,32.895 ; TP3.1@44.4,32.9 TP3.1@44.405,32.895
NetC10_1: C10.1 C11.2 R2.1 TP5.1 U1.4 | length 12.7
  Top Layer w0.5: U1.4 TP5.1@40.595,32.895 ; R2.1 C10.1 40.9,38.1 40.1,37.3 C11.2 40.1,34.5 40.6,34 TP5.1 ; TP5.1@40.595,32.895 TP5.1 ; TP5.1@40.595,32.895 TP5.1
NetC14_2: C14.2 FB3.1 P1.1 | length 10.6
  Top Layer w0.5: P1.1 FB3.1 C14.2
NetC23_1: C23.1 C24.2 R9.1 TP9.1 U2.1 | length 12.7
  Top Layer w0.5: R9.1 C24.2 75.1,38.1 75.9,37.3 C23.1 75.9,34.5 75.4,34 TP9.1@75.4,32.9 ; U2.1 TP9.1@75.405,32.895 ; TP9.1@75.4,32.9 TP9.1@75.405,32.895 ; TP9.1@75.4,32.9 TP9.1@75.405,32.895
NetC24_1: C24.1 C25.2 R10.1 TP11.1 U2.4 | length 12.7
  Top Layer w0.5: U2.4 TP11.1@71.595,32.895 ; R10.1 C24.1 71.9,38.1 71.1,37.3 C25.2 71.1,34.5 71.6,34 TP11.1 ; TP11.1@71.595,32.895 TP11.1 ; TP11.1@71.595,32.895 TP11.1
NetC28_2: C28.2 FB6.1 P4.1 | length 10.6
  Top Layer w0.5: P4.1 FB6.1 C28.2
NetC37_1: C37.1 C38.2 R17.1 TP15.1 U3.1 | length 12.7
  Top Layer w0.5: R17.1 C38.2 105.9,38.1 106.7,37.3 C37.1 106.7,34.5 106.2,34 TP15.1@106.2,32.9 ; U3.1 TP15.1@106.205,32.895 ; TP15.1@106.2,32.9 TP15.1@106.205,32.895 ; TP15.1@106.2,32.9 TP15.1@106.205,32.895
NetC38_1: C38.1 C39.2 R18.1 TP17.1 U3.4 | length 12.7
  Top Layer w0.5: U3.4 TP17.1@102.395,32.895 ; R18.1 C38.1 102.7,38.1 101.9,37.3 C39.2 101.9,34.5 102.4,34 TP17.1 ; TP17.1@102.395,32.895 TP17.1 ; TP17.1@102.395,32.895 TP17.1
NetC42_2: C42.2 FB9.1 P7.1 | length 10.6
  Top Layer w0.5: P7.1 FB9.1 C42.2
NetC45_1: C45.1 C46.2 L1.2 P10.2 P10.3 R28.1 R29.1 R30.1 T1.1 TP22.1 U4.2 | length 97.1
  Top Layer w0.4: 7.439,22.7 7.489,22.65
  Top Layer w0.5: P10.2 13.627,7.573 13.97,7.23 TP22.1 ; v1(13.9,26.1) 14.3,26.1 14.85,26.65 U4.2 15.75,26.65 16.1,27 16.1,28.4 15.4,29.1 R30.1
  Top Layer w0.8: 9.3,12.746 9.473,12.573
  Top Layer w1: L1.2 1.711,44.689 2.723,43.677 C46.2 2.723,40.423 2.032,39.732 2.032,28.067 ; P10.3 7.439,22.7 7.439,24.139 8.95,25.65 R28.1 8.95,31.45 9.484,31.984 T1.1@10.459,31.984 ; 9.3,12.746 9.3,13.6 12.65,16.95 C45.1
  Top Layer w1.2: 2.032,28.067 2.032,15.868 5.327,12.573 P10.3 ; 9.473,12.573 P10.3 ; P10.2 7.439,7.573 P10.3
  Bottom Layer w0.5: v1(7.1,24.2) 9,26.1 v1(13.9,26.1)
NetC45_2: C45.2 D1.K D2.2 Q1.2 R25.2 R26.2 T1.2 | length 23
  Top Layer w0: R25.2 14.35,22.05
  Top Layer w0.6: R26.2 18.976,29.878 Q1.2
  Top Layer w0.8: T1.2@10.459,34.284 11.916,34.284 ; D2.2 11.661,28.061 12.4,28.8 12.4,32.5 12.7,32.8 13.8,32.8 13.8,34.2 ; 12.4,32.8 12.4,34.2 ; 18.937,26.637 R26.2 ; 12.4,34.2 13.8,34.2 ; 12.4,34.2 12.4,35.6 13.8,35.6 13.8,34.2
NetC46_1: C46.1 D3.A L1.1 Q1.3 | length 29.9
  Top Layer w0.5: D3.A 17.74,34.125 Q1.3@17.899,34.284
  Top Layer w0.6: Q1.3@17.899,34.284 18.026,34.411
  Top Layer w1: L1.1 3.2,50.8 4.3,49.7 4.3,45.7 7.836,42.164 C46.1 11.836,42.164 18.026,35.974 18.026,34.411 Q1.3
NetD1_1: D1.A F1.2 TP20.1 | length 5.3
  Top Layer w0.5: F1.2 17.939,13.081 TP20.1
  Top Layer w1.2: D1.A 16.891,14.065 F1.2
NetD2_1: D2.1 R27.2 R28.2 | length 3.3
  Top Layer w0.8: R27.2 R28.2 D2.1@7.25,28.082
NetD3_K: D3.K R30.2 | length 1.3
  Top Layer w0.5: R30.2 D3.K
NetF1_1: F1.1 P10.1 TP19.1 | length 9.9
  Top Layer w0.5: F1.1 17.939,9.017 TP19.1
  Top Layer w1.2: P10.1@13.525,12.637 13.525,11.24 15.716,9.049 F1.1
NetQ1_1: Q1.1 R26.1 U4.3 | length 4.6
  Top Layer w0.5: U4.3 17,28.3 17.237,28.537 R26.1 17.076,30 Q1.1
NetR3_2: R3.2 S1.1@28.79,29.95 | length 2
  Bottom Layer w0.8: S1.1@28.79,29.95 28.84,30 R3.2
NetR4_2: R4.2 S1.2@28.79,27.41 | length 2
  Bottom Layer w0.8: S1.2@28.79,27.41 28.8,27.4 R4.2
NetR5_2: R5.2 S1.3@28.79,24.87 | length 2
  Bottom Layer w0.8: S1.3@28.79,24.87 28.82,24.9 R5.2
NetR6_2: R6.2 S1.4@28.79,22.33 | length 2
  Bottom Layer w0.8: S1.4@28.79,22.33 28.82,22.3 R6.2
NetR7_2: R7.2 S1.5@28.79,19.79 | length 2
  Bottom Layer w0.8: S1.5@28.79,19.79 28.8,19.8 R7.2
NetR8_2: R8.2 S1.6@28.79,17.25 | length 2
  Bottom Layer w0.8: S1.6@28.79,17.25 28.84,17.2 R8.2
NetR11_2: R11.2 S2.1 | length 2
  Bottom Layer w0.8: S2.1 59.84,30 R11.2
NetR12_2: R12.2 S2.2 | length 2
  Bottom Layer w0.8: S2.2 59.8,27.4 R12.2
NetR13_2: R13.2 S2.3 | length 2
  Bottom Layer w0.8: S2.3 59.82,24.9 R13.2
NetR14_2: R14.2 S2.4 | length 2
  Bottom Layer w0.8: S2.4 59.82,22.3 R14.2
NetR15_2: R15.2 S2.5 | length 2
  Bottom Layer w0.8: S2.5 59.8,19.8 R15.2
NetR16_2: R16.2 S2.6 | length 2
  Bottom Layer w0.8: S2.6 59.84,17.2 R16.2
NetR19_2: R19.2 S3.1 | length 2
  Bottom Layer w0.8: S3.1 90.64,30 R19.2
NetR20_2: R20.2 S3.2 | length 2
  Bottom Layer w0.8: S3.2 90.6,27.4 R20.2
NetR21_2: R21.2 S3.3 | length 2
  Bottom Layer w0.8: S3.3 90.62,24.9 R21.2
NetR22_2: R22.2 S3.4 | length 2
  Bottom Layer w0.8: S3.4 90.62,22.3 R22.2
NetR23_2: R23.2 S3.5 | length 2
  Bottom Layer w0.8: S3.5 90.6,19.8 R23.2
NetR24_2: R24.2 S3.6 | length 2
  Bottom Layer w0.8: S3.6 90.64,17.2 R24.2
NetR25_1: R25.1 S1.2@10.2,21.4 | length 2.5
  Top Layer w0.5: S1.2@10.2,21.4 R25.1
NetR27_1: R27.1 T1.3 | length 10.9
  Top Layer w0.8: R27.1 4.05,30.75 4.8,31.5 6.1,31.5 7.2,32.6 7.2,34.7 9.084,36.584 T1.3@10.459,36.584
NetR29_2: R29.2 S1.3@10.2,23.9 U4.1 | length 12.3
  Top Layer w0.5: S1.3@10.2,23.9 10.2,24.9 10.55,25.25 R29.2 ; v1(13.9,27.4) 14.45,27.95 U4.1
  Bottom Layer w0.5: S1.3@10.2,23.9 13.2,23.9 15.1,25.8 15.1,26.9 14.6,27.4 v1(13.9,27.4)
NetR31_1: R31.1 R32.2 TP24.1 U5.8 | length 12.2
  Top Layer w0.5: U5.8 TP24.1 19.313,40.513 20.066,41.266 R31.1 21.076,42.076 21.7,42.7 21.7,46.5 21.122,47.078 R32.2
OUTPUT_T1: P2.2 TP4.1 U1.7 | length 21.3
  Top Layer w0.5: U1.7 43.135,20.365 TP4.1 43.3,6 P2.2
OUTPUT_T2: P5.2 TP10.1 U2.7 | length 21.3
  Top Layer w0.5: U2.7 74.135,20.365 TP10.1 74.3,6 P5.2
OUTPUT_T3: P8.2 TP16.1 U3.7 | length 21.3
  Top Layer w0.5: U3.7 104.935,20.365 TP16.1 105.1,6 P8.2
T1_IN+: P1.3 R2.2 | length 13.3
  Top Layer w0.5: P1.3 41.7,53.8 R2.2
T1_IN-: P1.2 R1.2 | length 13.3
  Top Layer w0.5: R1.2 43.3,53.8 P1.2
T1_RG+: R3.1 R4.1 R5.1 R6.1 R7.1 R8.1 U1.3 | length 23.6
  Top Layer w0.5: v2(34.3,28.7) 37.4,28.7 37.8,28.3 41.2,28.3 41.865,28.965 U1.3
  Bottom Layer w0.5: 32.45,28.7 v2(34.3,28.7)
  Bottom Layer w0.8: R8.1 R7.1 R6.1 R5.1 R4.1 32.45,28.7 R3.1
T1_RG-: S1.7 S1.8 S1.9 S1.10 S1.11 S1.12 U1.2 | length 21.4
  Top Layer w0.5: S1.11 42.21,27.41 43.135,28.335 U1.2
  Bottom Layer w1: S1.7 S1.8 S1.9 S1.10 S1.11 S1.12
T2_IN+: P4.3 R10.2 | length 13.3
  Top Layer w0.5: P4.3 72.7,53.8 R10.2
T2_IN-: P4.2 R9.2 | length 13.3
  Top Layer w0.5: R9.2 74.3,53.8 P4.2
T2_RG+: R11.1 R12.1 R13.1 R14.1 R15.1 R16.1 U2.3 | length 23.6
  Top Layer w0.5: v2(65.3,28.7) 68.4,28.7 68.8,28.3 72.2,28.3 72.865,28.965 U2.3
  Bottom Layer w0.5: 63.45,28.7 v2(65.3,28.7)
  Bottom Layer w0.8: R16.1 R15.1 R14.1 R13.1 R12.1 63.45,28.7 R11.1
T2_RG-: S2.7 S2.8 S2.9 S2.10 S2.11 S2.12 U2.2 | length 21.4
  Top Layer w0.5: S2.11 73.21,27.41 74.135,28.335 U2.2
  Bottom Layer w1: S2.7 S2.8 S2.9 S2.10 S2.11 S2.12
T3_IN+: P7.3 R18.2 | length 13.3
  Top Layer w0.5: P7.3 103.5,53.8 R18.2
T3_IN-: P7.2 R17.2 | length 13.3
  Top Layer w0.5: R17.2 105.1,53.8 P7.2
T3_RG+: R19.1 R20.1 R21.1 R22.1 R23.1 R24.1 U3.3 | length 23.6
  Top Layer w0.5: v2(96.1,28.7) 99.2,28.7 99.6,28.3 103,28.3 103.665,28.965 U3.3
  Bottom Layer w0.5: 94.25,28.7 v2(96.1,28.7)
  Bottom Layer w0.8: R24.1 R23.1 R22.1 R21.1 R20.1 94.25,28.7 R19.1
T3_RG-: S3.7 S3.8 S3.9 S3.10 S3.11 S3.12 U3.2 | length 21.4
  Top Layer w0.5: S3.11 104.01,27.41 104.935,28.335 U3.2
  Bottom Layer w1: S3.7 S3.8 S3.9 S3.10 S3.11 S3.12
Vs+: C1.2 C7.2 C8.2 C15.2 C21.2 C22.2 C29.2 C35.2 C36.2 C43.2 C44.2 C47.1 FB1.2 FB4.2 FB7.2 L1.4 R31.2 TP21.1 U1.8 U2.8 U3.8 U5.3 | length 262.4
  Top Layer w0.5: L1.4 TP21.1 ; U1.8 44.405,22.795 v2(44.9,22.3) ; U2.8 75.405,22.795 v2(75.9,22.3) ; U3.8 106.205,22.795 v2(106.7,22.3)
  Top Layer w0.6: 15.875,49.9 U5.3 15.875,45.725 17.824,43.776 R31.2
  Top Layer w1: C43.2@10.452,53.771 C43.2 ; C47.1@13.518,55.626 C47.1 ; v1(33.7,33.5) C1.2 34.95,35.85 35.2,36.1 FB1.2 ; v1(64.7,33.5) C15.2 65.95,35.85 66.2,36.1 FB4.2 ; v1(95.5,33.5) C29.2 96.75,35.85 97,36.1 FB7.2
  Bottom Layer w0.5: v2(44.9,22.3) C8.2 44.9,24.2 45.15,24.45 C7.2 ; v2(75.9,22.3) C22.2 75.9,24.2 76.15,24.45 C21.2 ; v2(106.7,22.3) C36.2 106.7,24.2 106.95,24.45 C35.2
  Bottom Layer w1: v1(16.6,51.8) 33.7,34.7 v1(33.7,34.5) v1(33.7,33.5) 34.2,33 39.5,33 45.15,27.35 C7.2 ; v1(16.6,56.6) 25.9,56.6 38.1,44.4 85.6,44.4 v1(95.5,34.5) v1(95.5,33.5) 96,33 101.3,33 106.95,27.35 C35.2 ; v1(17.7,53) 19.6,51.1 25.4,51.1 36.6,39.9 59.8,39.9 64.7,35 v1(64.7,34.5) v1(64.7,33.5) 65.2,33 70.5,33 76.15,27.35 C21.2
  other v1: 15.5,51.8 15.5,53 16.6,53 16.6,54.2 17.7,54.2 16.6,55.4 17.7,55.4
Vs-: C5.1 C12.1 C13.1 C19.1 C26.1 C27.1 C33.1 C40.1 C41.1 C43.1 C44.1 C47.2 FB2.2 FB5.2 FB8.2 L1.3 R32.1 TP23.1 U1.5 U2.5 U3.5 U5.2 | length 261.5
  Top Layer w0.5: v2(40.1,22.3) 40.595,22.795 U1.5 ; v2(71.1,22.3) 71.595,22.795 U2.5 ; v2(101.9,22.3) 102.395,22.795 U3.5
  Top Layer w0.6: L1.3 11.16,48.26 TP23.1 ; R32.1 18.022,45.378 17.145,46.255 U5.2 17.145,50.445 20.772,54.072 C47.2
  Top Layer w1: L1.3 7.64,48.26 6.8,49.1 6.8,52.7 7.821,53.721 C43.1 8.852,53.771 C44.1 8.852,57.052 9.9,58.1 19.9,58.1 20.772,57.228 C47.2 ; v1(24.4,52.6) 27.4,49.6 27.4,36.8 28.1,36.1 FB2.2 29.8,36.1 30.05,35.85 C5.1 v1(31.3,33.5) ; v1(56.2,41.4) v1(57.2,41.4) 58,40.6 58,37.2 59.1,36.1 FB5.2 60.8,36.1 61.05,35.85 C19.1 v1(62.3,33.5) ; FB8.2 91.6,36.1 91.85,35.85 C33.1 v1(93.1,33.5)
  Bottom Layer w0.5: C12.1 39.85,24.45 40.1,24.2 v2(40.1,22.3) ; C26.1 70.85,24.45 71.1,24.2 v2(71.1,22.3) ; C40.1 101.65,24.45 101.9,24.2 v2(101.9,22.3)
  Bottom Layer w1: v1(24.4,52.6) 25.9,52.6 33.2,45.3 37.1,41.4 v1(56.2,41.4) v1(57.2,41.4) ; v1(24.4,53.7) 26.8,53.7 37.6,42.9 84.7,42.9 v1(93.1,34.5) v1(93.1,33.5) 95,31.6 99.1,31.6 101.65,29.05 C40.1 ; v1(31.3,34.5) v1(31.3,33.5) 33.2,31.6 37.3,31.6 39.85,29.05 C12.1 ; v1(62.3,34.5) v1(62.3,33.5) 64.2,31.6 68.3,31.6 70.85,29.05 C26.1
  other v1: 22,52.6 23.2,52.6 22,53.7 23.2,53.7
VT1+: C2.2 C3.2 C4.2 FB1.1 P3.1 TP1.1 | length 20.5
  Top Layer w1: P3.1 35,48.8 33.3,47.1 C4.2 33.3,43.65 C3.2 34.2,43.6 34.9,42.9 C2.2 35.6,39.4 35.9,39.1 FB1.1
VT1-: C3.1 C4.1 C6.1 FB2.1 P3.2 TP2.1 | length 20.5
  Top Layer w1: FB2.1 29.1,39.1 29.4,39.4 C6.1 30.1,42.9 30.8,43.6 C3.1 31.7,43.65 C4.1 31.7,47.1 30,48.8 P3.2
VT2+: C16.2 C17.2 C18.2 FB4.1 P6.1 TP7.1 | length 20.5
  Top Layer w1: P6.1 66,48.8 64.3,47.1 C18.2 64.3,43.65 C17.2 65.2,43.6 65.9,42.9 C16.2 66.6,39.4 66.9,39.1 FB4.1
VT2-: C17.1 C18.1 C20.1 FB5.1 P6.2 TP8.1 | length 20.5
  Top Layer w1: FB5.1 60.1,39.1 60.4,39.4 C20.1 61.1,42.9 61.8,43.6 C17.1 62.7,43.65 C18.1 62.7,47.1 61,48.8 P6.2
VT3+: C30.2 C31.2 C32.2 FB7.1 P9.1 TP13.1 | length 20.5
  Top Layer w1: P9.1 96.8,48.8 95.1,47.1 C32.2 95.1,43.65 C31.2 96,43.6 96.7,42.9 C30.2 97.4,39.4 97.7,39.1 FB7.1
VT3-: C31.1 C32.1 C34.1 FB8.1 P9.2 TP14.1 | length 20.5
  Top Layer w1: FB8.1 90.9,39.1 91.2,39.4 C34.1 91.9,42.9 92.6,43.6 C31.1 93.5,43.65 C32.1 93.5,47.1 91.8,48.8 P9.2
pads on no net: FID1.FID FID2.FID S1.1@10.2,18.9 S1.4@4.2,18.9 S1.5@4.2,21.4 S1.6@4.2,23.9 U5.4 U5.5 U5.6 U5.7
copper on no net:
  other v1: 30.4,-5.3 31.5,-5.3 32.6,-5.3 35.7,-4.2 38.7,-4.2 41.7,-4.2 44.7,-4.2 47.7,-4.2 50.7,-4.2 53.7,-4.2 56.7,-4.2 59.7,-4.2 62.7,-4.2 30.4,-4.1 31.5,-4.1 32.6,-4.1 30.4,-2.9 31.5,-2.9 32.6,-2.9

## Polygon pours and split planes (outlines as drawn)
GND on Top Layer "GND_L01_P076" (solid, remove dead copper, pour order 76): 0.5,59.5 0.5,0.5 121.5,0.5 121.5,59.5
Vs- on Top Layer "VS-_L01_P058" (solid, pour order 58): 8.4,48.9 12.9,48.9 13.7,48.1 13.7,44.5 12.8,43.6 8.1,43.6 5.5,46.2 5.5,52.1 7.9,54.5 7.9,57.9 9.5,59.5 24,59.5 25.5,58 25.5,53 24.2,51.7 18.8,51.7 18.8,51.8 18.8,56.7 17.9,57.6 10.1,57.6 9.3,56.8 9.3,53.3 9,53 8,53 7.3,52.3 7.3,50
Vs+ on Top Layer "VS+_L01_P032" (solid, pour order 32): 9.9,56.7 10.4,57.2 17.6,57.2 18.3,56.5 18.3,52.8 16.2,50.7 16.2,49.8 15.9,49.5 8.5,49.5 7.8,50.2 7.8,52.1 8.2,52.5 9.5,52.5 9.9,52.9
no net on Top Layer "Top Layer-GND" (solid, pour order 54): 93.2,41.85 93.2,40.65 95.4,40.65 95.4,41.85
no net on Top Layer "Top Layer-GND" (solid, pour order 44): 62.4,41.85 62.4,40.65 64.6,40.65 64.6,41.85
NetC45_2 on Top Layer "Top Layer-NetC45_1" (solid, pour order 6): 3.6,32.7 3.6,37.2 6.7,40.3 11.7,40.3 14.4,37.6 14.4,29.1 13,27.7 13,27.5 12.8,27.5 10.1,27.5 10.1,30 10.7,30.6 11.5,30.6 12,31.1 12,33.2 11.3,33.9 9.5,33.9 9.5,34.7 11.3,34.7 12,35.4 12,37.3 11.6,37.7 8.5,37.7 6.1,35.3 6.1,33.3 5.5,32.7
GND on Top Layer "Top Layer-GND" (solid, pour order 16): 31.4,41.85 31.4,40.65 33.6,40.65 33.6,41.85
NetC45_2 on Top Layer "Top Layer-NetC45_1" (solid, pour order 8): 13.7,17.4 17.8,17.4 19.4,19 19.4,29.8 18.5,29.8 18.5,26.9 16.8,25.2 13.5,25.2 13,25.7 13,27.5 11.25,27.5 11.8,26.9 11.8,23.1 12.2,22.7 13.5,22.7 13.9,22.3 13.9,20.1 13.8,20.1 13.7,20
NetC45_1 on Top Layer "Top Layer-NetC45_1" (solid, pour order 4): 2.7,48.9 0.5,48.9 0.5,9.3 1.7,8.1 6,8.1 9.9,4.2 14.4,4.2 14.9,4.7 14.9,6.7 11.3,10.3 11.3,14.6 13.2,16.5 13.2,18.9 12.1,18.9 12.1,18.2 10.9,17 9.5,17 8.6,17.9 8.6,24.6 9.448,25.448 9.4,27.7 8.9,27.7 8.048,26.848 5.5,24.3 5.5,18.3 4.6,17.4 3.7,17.4 2.9,18.2 2.9,24.7 2.9,34.5 2.9,37.5 5.1,39.7 5.1,43.2 2.7,45.6
GND on Bottom Layer "GND_L02_P074" (solid, remove dead copper, pour order 74): 0.5,59.5 0.5,0.5 121.5,0.5 121.5,59.5

## Other copper
Top Layer:
  pour cut-out: 41,19.696 41,7.01 40.12,6.13 39.488,6.13 38.338,5.196 38.338,3.922 39.803,2.742 44.838,2.742 44.838,5.283 42.425,5.283 42.438,19.696
Bottom Layer:
  region net Vs-: 18.8,55.6 18.8,53.4 20.1,52.1 25.5,52.1 25.5,55.6
  region net Vs+: 15,57.2 15,51.2 15.3,50.9 16.4,50.9 16.4,51 18.3,52.9 18.3,57 18.1,57.2

## Silkscreen, mask and mechanical layers (free items; w line width, h text height)
Top Overlay:
  lines w0.2: 42.5,10 42.5,11.6 ; 46.2,18.2 54.3,18.2 ; 46.2,20.4 54.3,20.4 ; 46.2,22.6 54.3,22.6 ; 46.2,24.8 54.3,24.8 ; 46.2,27 54.3,27 ; 46.2,29.2 54.3,29.2 ; 48,16 48,29.2 ; 73.5,10 73.5,11.6 ; 77.2,18.2 85.3,18.2 ; 77.2,20.4 85.3,20.4 ; 77.2,22.6 85.3,22.6 ; 77.2,24.8 85.3,24.8 ; 77.2,27 85.3,27 ; 77.2,29.2 85.3,29.2 ; 79,16 79,29.2 ; 104.3,10 104.3,11.6 ; 108,18.2 116.1,18.2 ; 108,20.4 116.1,20.4 ; 108,22.6 116.1,22.6 ; 108,24.8 116.1,24.8 ; 108,27 116.1,27 ; 108,29.2 116.1,29.2 ; 109.8,16 109.8,29.2 ; 32.3,47.5 35.3,47.5 ; 32.3,47.5 32.3,50 ; 32.3,47.5 29.3,47.5 29.3,50 32.3,50 ; 32.3,50 35.3,50 ; 35.3,47.5 39.3,47.5 ; 35.3,47.5 35.3,50 ; 35.3,50 39.3,50 ; 39.3,47.5 43.3,47.5 ; 39.3,47.5 39.3,50 ; 39.3,50 43.3,50 ; 43.3,47.5 50.7,47.5 50.7,50 43.3,50 ; 43.3,47.5 43.3,50 ; 63.3,47.5 60.3,47.5 60.3,50 63.3,50 ; 63.3,47.5 63.3,50 ; 63.3,47.5 66.3,47.5 ; 63.3,50 66.3,50 ; 66.3,47.5 66.3,50 ; 66.3,47.5 70.3,47.5 ; 66.3,50 70.3,50 ; 70.3,47.5 70.3,50 ; 70.3,47.5 74.3,47.5 ; 70.3,50 74.3,50 ; 74.3,47.5 74.3,50 ; 74.3,47.5 81.7,47.5 81.7,50 74.3,50 ; 94.1,47.5 97.1,47.5 ; 94.1,47.5 94.1,50 ; 94.1,47.5 91.1,47.5 91.1,50 94.1,50 ; 94.1,50 97.1,50 ; 97.1,47.5 101.1,47.5 ; 97.1,47.5 97.1,50 ; 97.1,50 101.1,50 ; 101.1,47.5 105.1,47.5 ; 101.1,47.5 101.1,50 ; 101.1,50 105.1,50 ; 105.1,47.5 112.5,47.5 112.5,50 105.1,50 ; 105.1,47.5 105.1,50 ; 40.1,10 40.1,11.6 44.6,11.6 44.6,10 40.1,10 ; 46.2,16 54.375,16 54.375,31.4 46.2,31.4 46.2,16 ; 71.1,10 75.6,10 75.6,11.6 71.1,11.6 71.1,10 ; 77.2,16 77.2,31.4 85.375,31.4 85.375,16 77.2,16 ; 101.9,10 101.9,11.6 106.4,11.6 106.4,10 101.9,10 ; 108,16 116.175,16 116.175,31.4 108,31.4 108,16
  lines w0.3: 24.3,14.5 24.3,58.2 ; 24.7,14.5 24.7,58.2 ; 55.3,14.5 55.3,58.2 ; 55.7,14.5 55.7,58.2 ; 86.3,14.5 86.3,58.2 ; 86.7,14.5 86.7,58.2 ; 117.1,14.5 117.1,47.5 ; 117.5,14.5 117.5,47.5
  text "V-" at 29.8,48.1 h1.2
  text "V+" at 32.8,48.1 h1.2
  text "In+" at 35.8,48.1 h1.2
  text "In-" at 39.8,48.1 h1.2
  text "Shield" at 43.8,48.1 h1.2
  text "V-" at 60.8,48.1 h1.2
  text "V+" at 63.8,48.1 h1.2
  text "In+" at 66.8,48.1 h1.2
  text "In-" at 70.8,48.1 h1.2
  text "Shield" at 74.8,48.1 h1.2
  text "V-" at 91.6,48.1 h1.2
  text "V+" at 94.6,48.1 h1.2
  text "In+" at 97.6,48.1 h1.2
  text "In-" at 101.6,48.1 h1.2
  text "Shield" at 105.6,48.1 h1.2
  text "Gain" at 48,29.7 h1.2
  text "Gain" at 79,29.7 h1.2
  text "Gain" at 109.8,29.7 h1.2
  text "12-15V DC" at 0.7,29 h2.5 r270
  text "1" at 46.9,27.5 h1.2
  text "991" at 48.5,27.5 h1.2
  text "1" at 77.9,27.5 h1.2
  text "991" at 79.5,27.5 h1.2
  text "1" at 108.7,27.5 h1.2
  text "991" at 110.3,27.5 h1.2
  text "2" at 46.7,25.3 h1.2
  text "727.5" at 48.5,25.3 h1.2
  text "2" at 77.7,25.3 h1.2
  text "727.5" at 79.5,25.3 h1.2
  text "2" at 108.5,25.3 h1.2
  text "727.5" at 110.3,25.3 h1.2
  text "3" at 46.7,23.1 h1.2
  text "495" at 48.5,23.1 h1.2
  text "3" at 77.7,23.1 h1.2
  text "495" at 79.5,23.1 h1.2
  text "3" at 108.5,23.1 h1.2
  text "495" at 110.3,23.1 h1.2
  text "4" at 46.7,20.9 h1.2
  text "330.3" at 48.5,20.9 h1.2
  text "4" at 77.7,20.9 h1.2
  text "330.3" at 79.5,20.9 h1.2
  text "4" at 108.5,20.9 h1.2
  text "330.3" at 110.3,20.9 h1.2
  text "5" at 46.7,18.7 h1.2
  text "275.4" at 48.5,18.7 h1.2
  text "5" at 77.7,18.7 h1.2
  text "275.4" at 79.5,18.7 h1.2
  text "5" at 108.5,18.7 h1.2
  text "275.4" at 110.3,18.7 h1.2
  text "6" at 46.7,16.5 h1.2
  text "184" at 48.6,16.5 h1.2
  text "6" at 77.7,16.5 h1.2
  text "184" at 79.6,16.5 h1.2
  text "6" at 108.5,16.5 h1.2
  text "184" at 110.4,16.5 h1.2
  text "Output" at 39.5,12.4 h1.2
  text "Output" at 70.5,12.4 h1.2
  text "Output" at 101.3,12.4 h1.2
  text "-" at 40.9,10.2 h1.2
  text "+" at 43.2,10.2 h1.2
  text "-" at 71.9,10.2 h1.2
  text "+" at 74.2,10.2 h1.2
  text "-" at 102.7,10.2 h1.2
  text "+" at 105,10.2 h1.2
  text "TTAmp 3T0K Rev. 0.1" at 8,2.6 h2.3
  text "E" at 82.7,1.4 h15
  text "Var. .VariantName" at 8,0.9 h2.3
  text "A" at 47.7,-3.8 h20